# Altium PCB LPB-1.PcbDoc
Units mil, origin at the board's own origin, x right, y up, seen from the top; angles counter-clockwise.
Board outline 3275 x 1295 mil, 2 copper layers (Top Layer, Bottom Layer); 11 components, 8 nets, 26 pads, 0 vias.
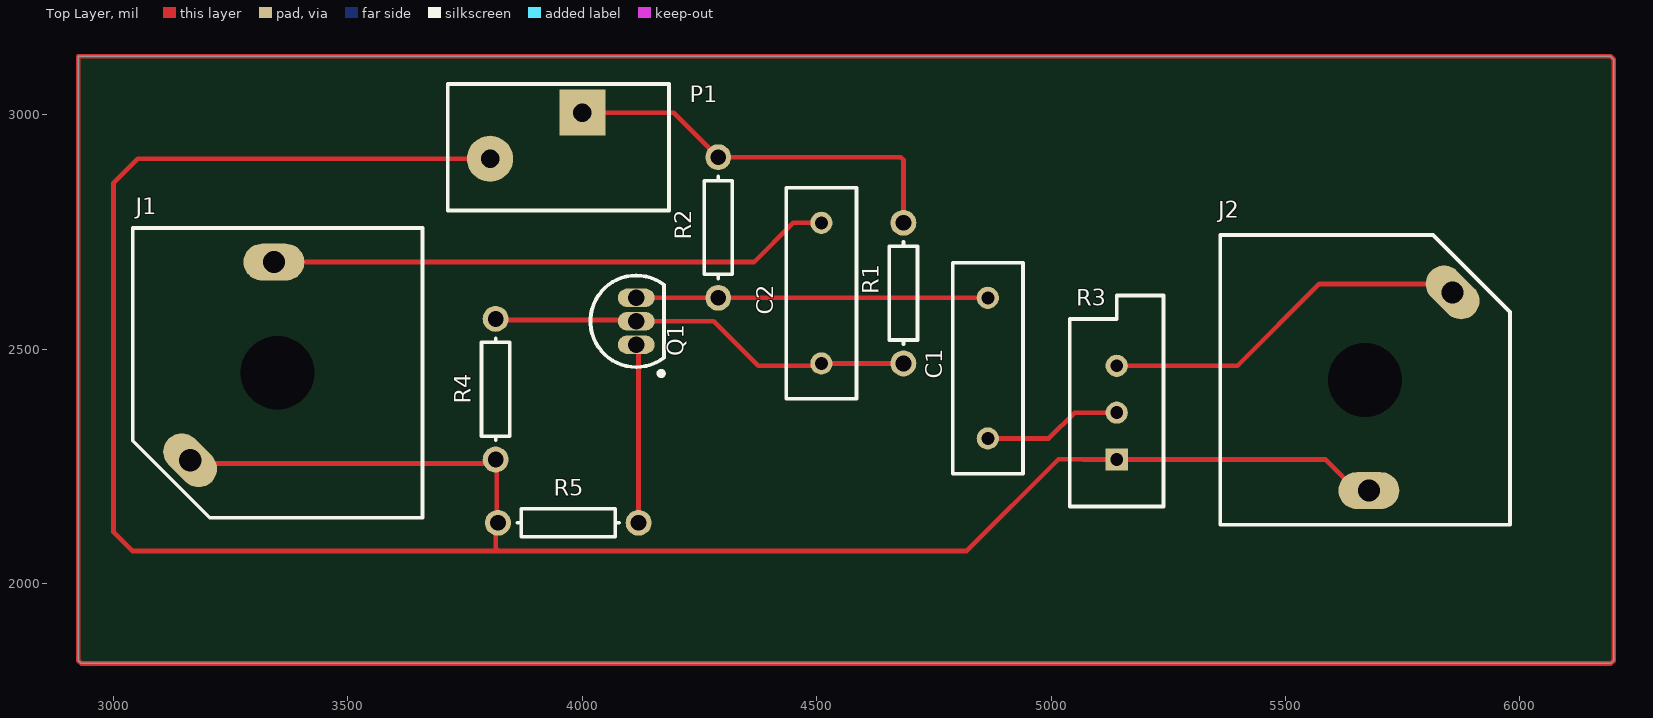
[diagram p0: Top Layer view]
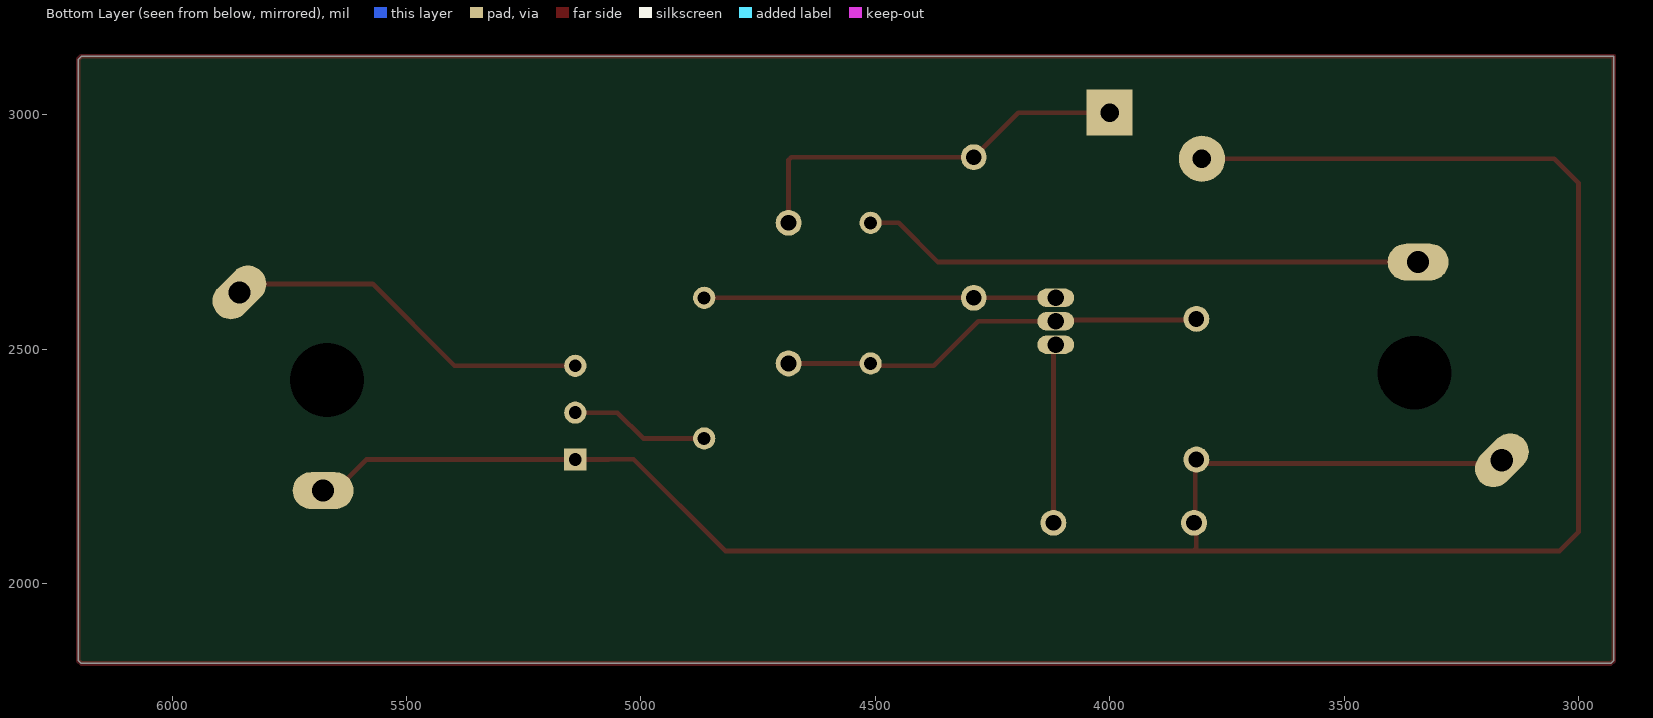
[diagram p1: Bottom Layer view, seen from below]

## Layer stack, top to bottom
Top Solder: solder mask 0.4, Solder Resist, Dk 3.5
Top Layer: signal copper 1.4
Dielectric 1: dielectric 12.6, FR-4, Dk 4.8
Bottom Layer: signal copper 1.4
Bottom Solder: solder mask 0.4, Solder Resist, Dk 3.5

## Board outline
2925,1835.86 2930.86,1830 6194.14,1830 6200,1835.86 6200,3119.14 6194.14,3125 2925,3125

## Design rules (kind name [scope] priority, off if disabled: settings)
Clearance [All] p1: gap=10 ignorepadtopadclearanceinfootprint=FALSE except(0: Arc-Hole Track-Hole SMDPad-Hole THPad-Hole Via-Hole Fill-Hole Poly-Hole Region-Hole Text-Hole)
PolygonConnect [All] p1: connectstyle=Relief reliefconductorwidth=10 reliefentries=4 polygonreliefangle="90 Angle" airgapwidth=10
RoomDefinition LPB-1 [InComponentClass('LPB-1')] p1: confinementstyle=ConfineIn formatcopy=TRUE lockcomponents=FALSE outline 2970,2000 6095,2000 6095,3080 2970,3080
RoutingVias [All] p1: holewidth=28 width=50 viastyle="Through Hole" minholewidth=28 minwidth=50 maxholewidth=28 maxwidth=50
SolderMaskExpansion [All] p1: expansion=4 istentingtop=FALSE
Width [All] p1: maxlimit=10 minlimit=10 preferedwidth=10
30 further rules are at their usual default settings.

## Components (designator, comment, footprint, x,y, rotation, side; value= is the part's Value field where it differs from the comment)
C1 "Cap" RAD-0.3 4865,2460 r270 top value=150nF
C2 "Cap" RAD-0.3 4510,2620 r270 top value=150nF
J1 "Phonejack2" JACK/6-V2 3350,2450 r90 top
J2 "Phonejack2" JACK/6-V2 5670,2435 r270 top
P1 "2.5mm Vert." 250-402/350-604_WAG 4000,3005 r90 top
Q1 "2N3904" TO-92A 4115,2560 r0 top
R1 "Res1" AXIAL-0.3 4685,2620 r90 top value=830K
R2 "Res1" AXIAL-0.3 4290,2760 r90 top value=10K
R3 "RPot" VR5 5140,2365 r90 top value=100K
R4 "Res1" AXIAL-0.3 3815,2415 r90 top value=100K
R5 "Res1" AXIAL-0.3 3970,2130 r0 top value=360

## Footprints (in the part's own frame and the unit in brackets; to place one, negate y for a bottom-side part, rotate by r counter-clockwise, add the part's x,y. Pads: shape width x height; smd on the part's side, far side on the other; paste and mask are expansions set on the pad)
250-402/350-604_WAG [mm] "Pacb Terminal Strips for THR Soldering"
  rect 2.5x2.5 hole 1: 1(0,0)
  round 2.5 hole 1: 2(-2.5,5)
  silkscreen extent -5.3,-4.7 1.55,7.3, body extent -5.3,-4.7 1.2,7.3, height 13.1
AXIAL-0.3 [mm] "Axial Device, Thru-Hole; 2 Leads; 0.3 in Pin Spacing"
  round 1.4 hole 0.85: 1(-3.81,0) 2(3.81,0)
  silkscreen extent -2.77,-0.76 2.77,0.76
JACK/6-V2 [mm] "Connector; Jack Socket, 1/4\" [6.5mm], Thru-Hole, 2 Position, Vertical, Body 15.7 x 15.7 x 31 mm (WxTxH)"
  oval 2x3.3 hole 1.2: 1(6,0.2)
  oval 2x3.3 hole 1.2 rot 135: 5(-4.738,4.738)
  round 3.7 hole 4: MH1(0,0)
  silkscreen extent -7.85,-7.85 7.85,7.85
RAD-0.3 [mm] "Radial Cap, Thru-Hole; 2 Leads; 0.3 in Pin Spacing"
  round 1.2 hole 0.7: 1(-3.81,0) 2(3.81,0)
  silkscreen extent -5.71,-1.91 5.71,1.91
TO-92A [mm] "TO, Flat Index; 3 In-Line, Axial Leads; Body Dia. 4.5mm; Leads 0.51 x 0.48 mm (max)"
  oval 2x1 hole 0.9: 1(0,-1.27) 2(0,0) 3(0,1.27)
  silkscreen extent -2.48,-2.95 1.5,2.48, body extent -2.48,-2.5 1.5,2.5, height 6.86
VR5 [mm] "Thru-Hole; 3 Leads"
  rect 1.2x1.2 hole 0.7: 1(-2.54,0)
  round 1.2 hole 0.7: 2(0,0) 3(2.54,0)
  silkscreen extent -5.08,-2.54 6.35,2.54

## Part data
C1 C2: "Capacitor", LatestRevisionDate=17-Jul-2002, LatestRevisionNote="Re-released for DXP Platform.", PackageDescription="Radial Cap, Thru-Hole; 2 Leads; 0.3 in Pin Spacing", PackageReference=RAD-0.3, Published=8-Jun-2000, Publisher="Altium Limited"
J1 J2: "Jack Socket, 1/4\" [6.5mm], Thru-Hole, Vertical, 2-Conductor Open Circuit", PackageDocument=2003, ComponentLink1Description="Manufacturer Link", ComponentLink1URL=http://www.cliffuk.co.uk/, DatasheetDocument=2003, DrillAndSlotSize="Corresponds to nominal value.", LatestRevisionDate=15-Jul-2004, LatestRevisionNote="Component Replaced.", PackageReference=S1VS_SNS, PCB_Layout="Complies with manufacturer's recommendation.", Publisher="Altium Limited"
P1: library part 2P_250-402/350-604_WA, "PCB TERMINAL STRIPS FOR THR SOLDERING 250 SERIES", Manufacturer_A=WAGO, Package_A=2.5mm, PartNumber_A=250-402/350-604, ComponentLink1Description=Datasheet, ComponentLink1URL=DATASHEETS\250-402/350-604.PDF
Q1: "NPN General Purpose Amplifier", ComponentLink1Description="Manufacturer Link", ComponentLink1URL=http://www.fairchildsemi.com/, ComponentLink2Description=Datasheet, ComponentLink2URL=http://www.fairchildsemi.com/ds/2N%2F2N3904.pdf, DatasheetVersion=1997, LatestRevisionDate=15-Jan-2003, LatestRevisionNote="PCB Footprint 'BCY-W3/D4.7' replaced", PackageDescription="TO, Flat Index; 3 In-Line, Axial Leads; Body Dia. 4.5mm; Leads 0.51 x 0.48 mm (max)", PackageReference=TO-92A, PackageVersion=Sep-1998, Published=8-Jun-2000, Publisher="Altium Limited"
R1 R2 R4 R5: "Resistor", LatestRevisionDate=17-Jul-2002, LatestRevisionNote="Re-released for DXP Platform.", PackageDescription="Axial Device, Thru-Hole; 2 Leads; 0.3 in Pin Spacing", PackageReference=AXIAL-0.3, Published=8-Jun-2000, Publisher="Altium Limited"
R3: "Potentiometer", LatestRevisionDate=17-Jul-2002, LatestRevisionNote="Re-released for DXP Platform.", PackageDescription="Variable Resistor, Thru-Hole; 3 Leads", PackageReference=VR5, Published=8-Jun-2000, Publisher="Altium Limited", Set Position=0.5, Sim Note="Enter the Resistance value and the set point into parameter fields."

## Nets (pads, with @x,y where several pads share a name; then routed paths per layer and width w, separated by ;. In a path a pad name is that pad's centre, name@x,y a point inside that pad or via, vN(x,y) a via of type N, cw(c..) or ccw(c..) an arc to the next point about the centre after c; other vN are vias at no path point)
GND: J1.5 J2.1 P1.2 R3.1 R4.1 R5.1 | length 5232.5
  Top Layer w10: J1.5 3170.56,2256.37 3806.37,2256.37 R4.1 3817.5,2262.5 3817.5,2132.5 R5.1 3815,2125 3815,2075.86 3820.86,2070 ; P1.2 3051.57,2906.57 3000,2855 3000,2110 3040,2070 3820.86,2070 ; J2.1 5652.28,2198.78 5586.06,2265 R3.1 5069.05,2265 5068.19,2265.86 5015.86,2265.86 4820,2070 3820.86,2070
NetC1_1: C1.1 Q1.3 R2.1 | length 750
  Top Layer w10: Q1.3 R2.1 C1.1
NetC1_2: C1.2 R3.2 | length 297.8
  Top Layer w10: C1.2 4995,2310 5050,2365 R3.2
NetC2_1: C2.1 J1.1 | length 1207
  Top Layer w10: J1.1@3345.24,2683.11 J1.1 4366.22,2686.22 4450,2770 C2.1
NetC2_2: C2.2 Q1.2 R1.1 R4.2 | length 913.5
  Top Layer w10: R4.2 3817.5,2562.5 4112.5,2562.5 Q1.2 4280,2560 4375,2465 4505,2465 C2.2 R1.1
NetJ2_5: J2.5 R3.3 | length 796.4
  Top Layer w10: R3.3 5397.64,2465 5572.27,2639.63 5838.44,2639.63 J2.5
NetQ1_1: Q1.1 R5.2 | length 382.1
  Top Layer w10: Q1.1 4120,2505 R5.2
VCC: P1.1 R1.2 R2.2 | length 860.6
  Top Layer w10: P1.1 4195,3005 R2.2 ; R2.2@4290.17,2909.83 4679.14,2909.83 4685,2903.97 R1.2
pads on no net: J1.MH1 J2.MH1
copper on no net: | length 9129.7
  Top Layer w10: 2925,1835.86 2930.86,1830 6194.14,1830 6200,1835.86 6200,3119.14 6194.14,3125 2925,3125 2925,1835.86

## Text inside footprints (layer, text, board x,y; h text height)
J1: Mechanical 1 "Mech 2 - Clearance, move to internal plane if present" at 3028.74,2138.98 h11.81 r90; Mechanical 1 "Mech 1 - Slot cut-out" at 3009.06,2138.98 h11.81 r90; Mechanical 1 "Assign keep-out area to slot" at 2950,2138.98 h11.81 r90; Mechanical 1 "Slot 1.2x2.5mm, PTH" at 2989.37,2138.98 h11.81 r90; Mechanical 1 "Alert PCB fab to slot details" at 2969.69,2138.98 h11.81 r90
J2: Mechanical 1 "Mech 2 - Clearance, move to internal plane if present" at 5991.26,2746.02 h11.81 r270; Mechanical 1 "Mech 1 - Slot cut-out" at 6010.94,2746.02 h11.81 r270; Mechanical 1 "Assign keep-out area to slot" at 6070,2746.02 h11.81 r270; Mechanical 1 "Slot 1.2x2.5mm, PTH" at 6030.63,2746.02 h11.81 r270; Mechanical 1 "Alert PCB fab to slot details" at 6050.31,2746.02 h11.81 r270